# Altium PCB PCB1.PcbDoc
Units mm, origin at the board's own origin, x right, y up, seen from the top; angles counter-clockwise.
Board outline 96.39 x 101.85 mm, 2 copper layers (Top Layer, Bottom Layer); 123 components, 13 nets, 380 pads, 0 vias.
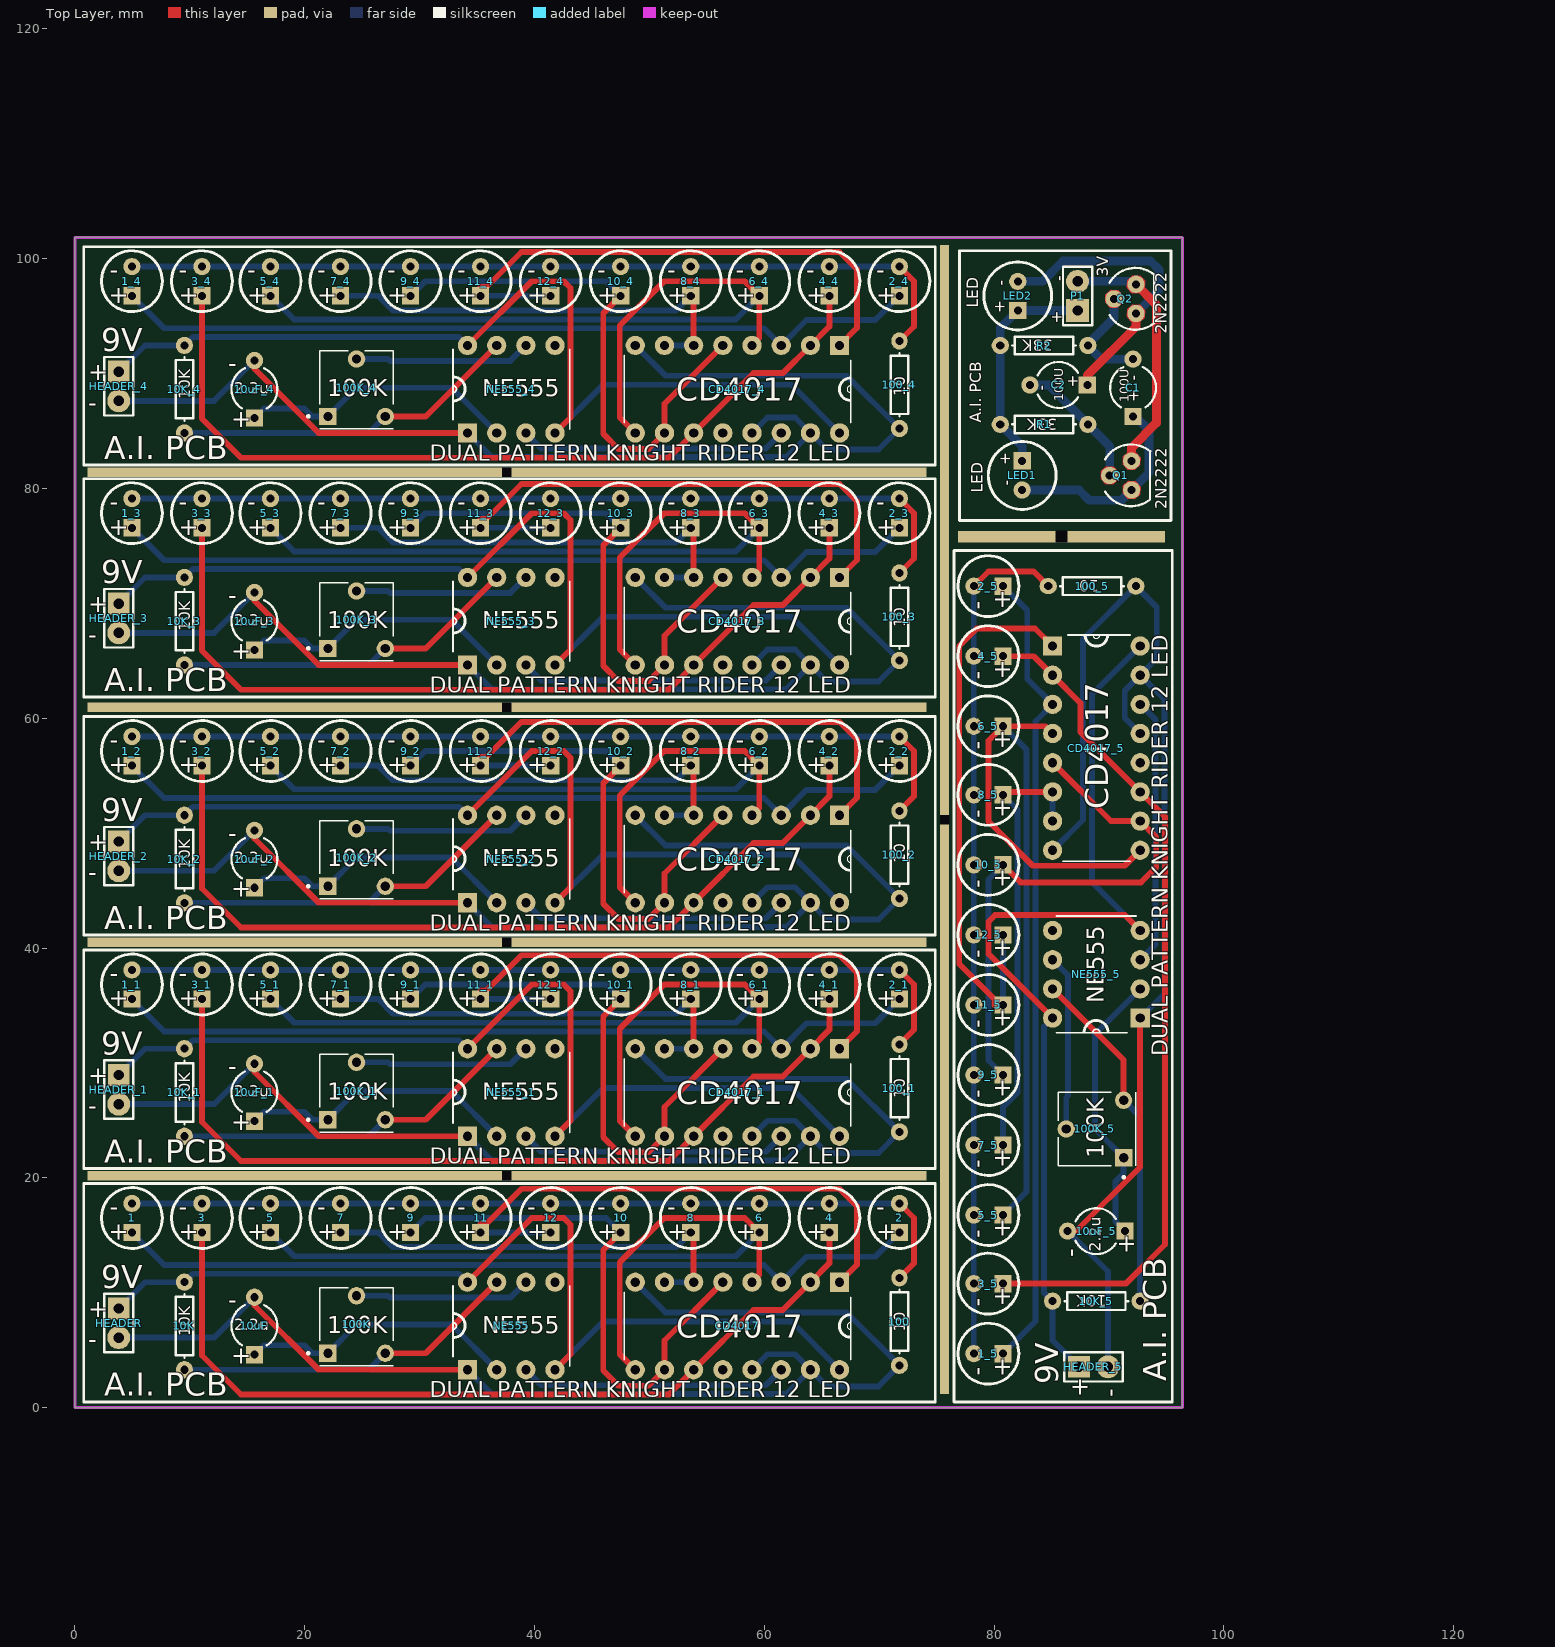
[diagram p0: Top Layer view]
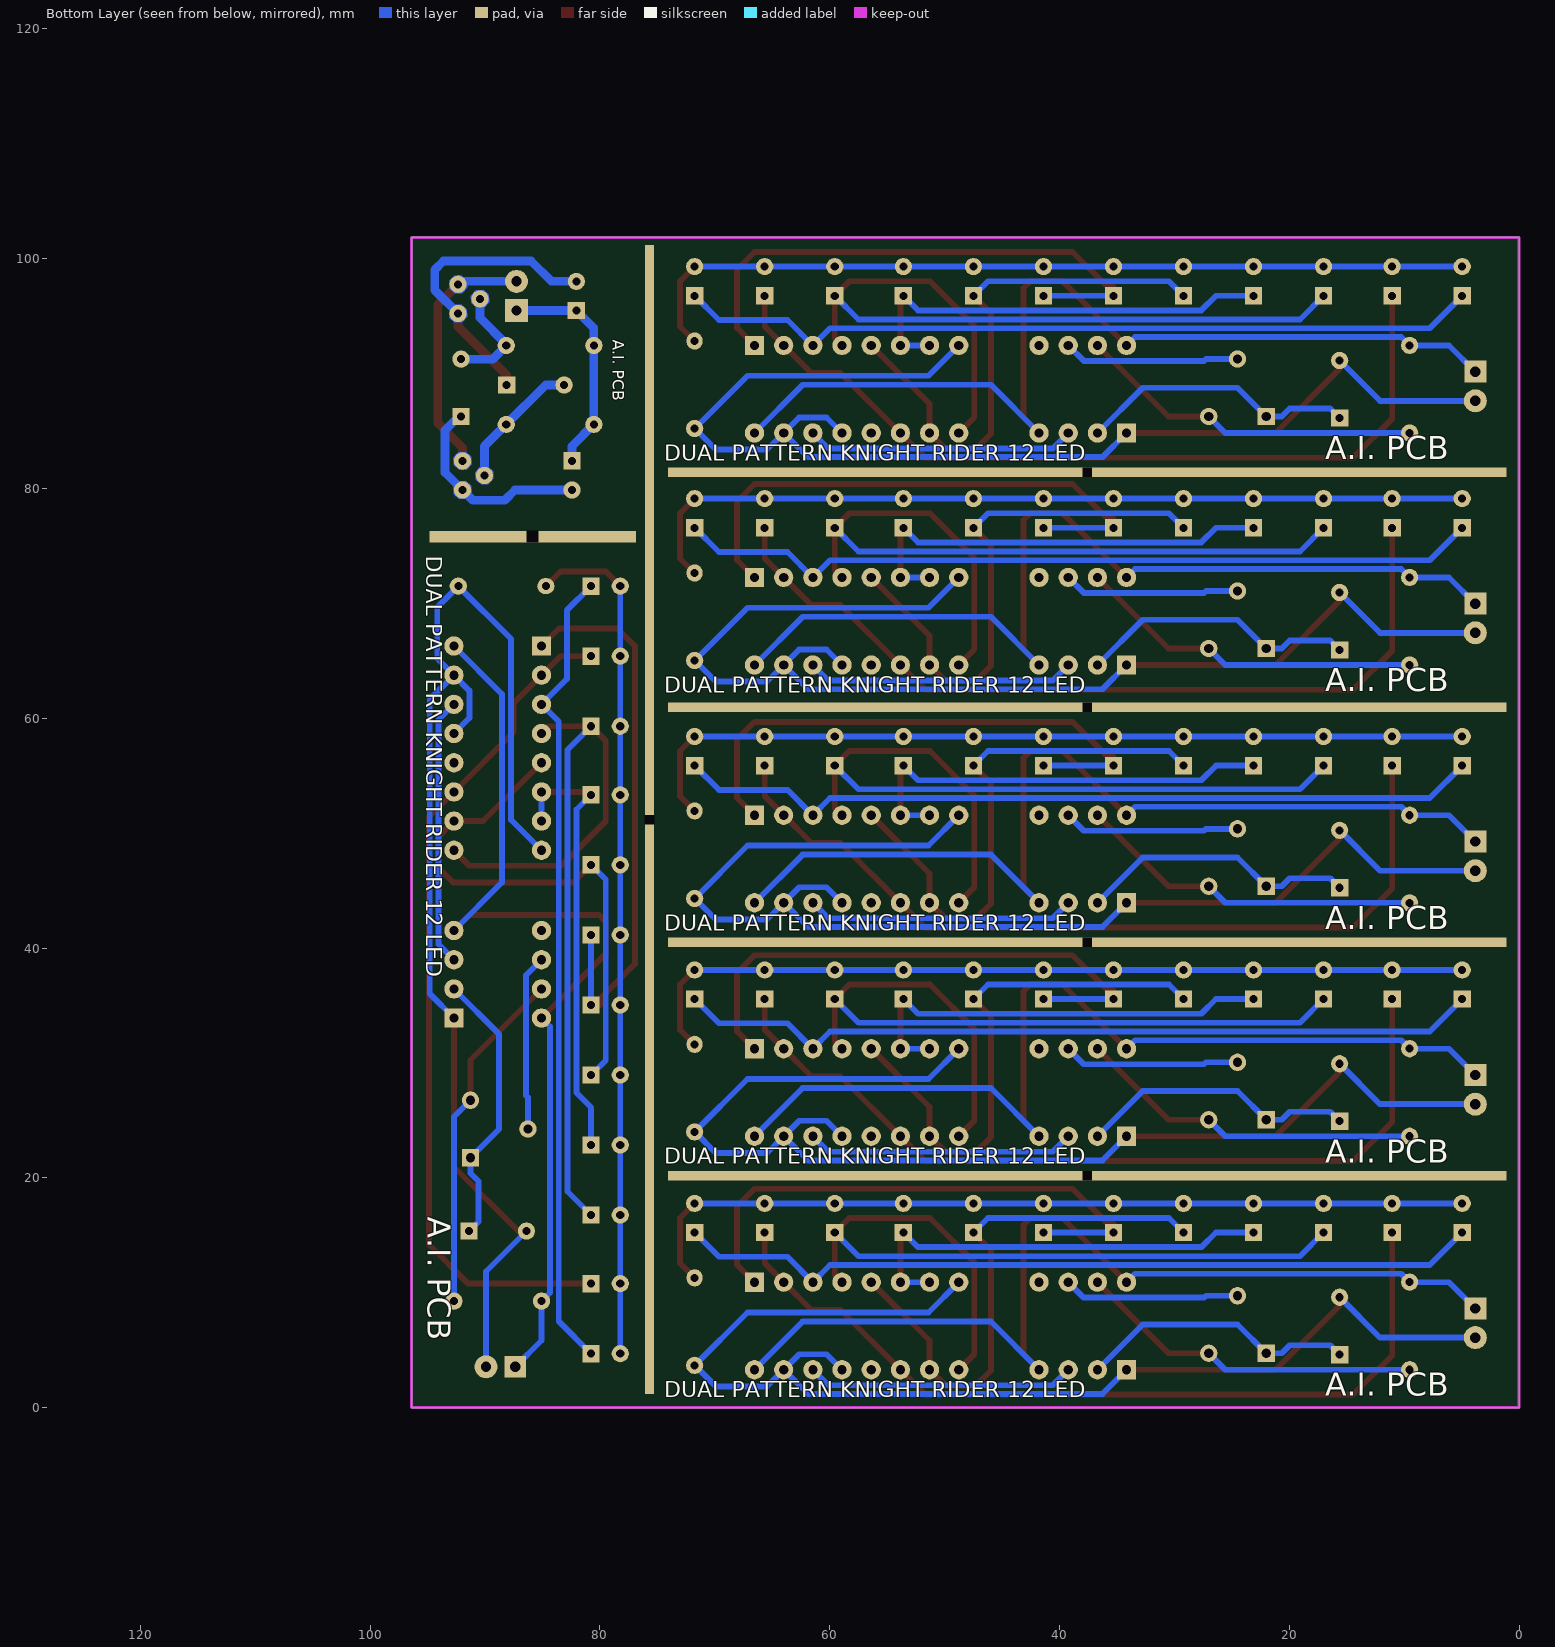
[diagram p1: Bottom Layer view, seen from below]

## Layer stack, top to bottom
Top Solder: solder mask 0.0102, Solder Resist, Dk 3.5
Top Layer: signal copper 0.0356
Dielectric 1: dielectric 0.32, FR-4, Dk 4.8
Bottom Layer: signal copper 0.0356
Bottom Solder: solder mask 0.0102, Solder Resist, Dk 3.5

## Board outline
0,0 0,101.854 96.393,101.854 96.393,0

## Design rules (kind name [scope] priority, off if disabled: settings)
Clearance [All] p1: gap=0.254 ignorepadtopadclearanceinfootprint=FALSE except(0: Arc-Hole Track-Hole SMDPad-Hole THPad-Hole Via-Hole Fill-Hole Poly-Hole Region-Hole Text-Hole)
PolygonConnect [All] p1: connectstyle=Relief reliefconductorwidth=0.254 reliefentries=4 polygonreliefangle="90 Angle" airgapwidth=0.254
RoutingVias [All] p1: holewidth=0.711 width=1.27 viastyle="Through Hole" minholewidth=0.711 minwidth=1.27 maxholewidth=0.711 maxwidth=1.27
SolderMaskExpansion [All] p1: expansion=0.102
Width [All] p1: maxlimit=0.762 minlimit=0.254 preferedwidth=0.508
30 further rules are at their usual default settings.

## Classes and differential pairs
component class Sheet1: 1 2 3 4 5 6 7 8 9 10 10K 10uF 11 12 100 100K CD4017 HEADER NE555

## Components (designator, comment, footprint, x,y, rotation, side; value= is the part's Value field where it differs from the comment)
1 "L-53GD" L-53GD 4.953,16.51 r90 top
1_1 "L-53GD" L-53GD 4.953,36.83 r90 top (schematic designator 1)
1_2 "L-53GD" L-53GD 4.953,57.15 r90 top (schematic designator 1)
1_3 "L-53GD" L-53GD 4.953,77.851 r90 top (schematic designator 1)
1_4 "L-53GD" L-53GD 4.953,98.044 r90 top (schematic designator 1)
1_5 "L-53GD" L-53GD 79.502,4.699 r180 top (schematic designator 1)
2 "L-53GD" L-53GD 71.755,16.51 r90 top
2_1 "L-53GD" L-53GD 71.755,36.83 r90 top (schematic designator 2)
2_2 "L-53GD" L-53GD 71.755,57.15 r90 top (schematic designator 2)
2_3 "L-53GD" L-53GD 71.755,77.851 r90 top (schematic designator 2)
2_4 "L-53GD" L-53GD 71.755,98.044 r90 top (schematic designator 2)
2_5 "L-53GD" L-53GD 79.502,71.501 r180 top (schematic designator 2)
3 "L-53GD" L-53GD 11.049,16.51 r90 top
3_1 "L-53GD" L-53GD 11.049,36.83 r90 top (schematic designator 3)
3_2 "L-53GD" L-53GD 11.049,57.15 r90 top (schematic designator 3)
3_3 "L-53GD" L-53GD 11.049,77.851 r90 top (schematic designator 3)
3_4 "L-53GD" L-53GD 11.049,98.044 r90 top (schematic designator 3)
3_5 "L-53GD" L-53GD 79.502,10.795 r180 top (schematic designator 3)
4 "L-53GD" L-53GD 65.659,16.51 r90 top
4_1 "L-53GD" L-53GD 65.659,36.83 r90 top (schematic designator 4)
4_2 "L-53GD" L-53GD 65.659,57.15 r90 top (schematic designator 4)
4_3 "L-53GD" L-53GD 65.659,77.851 r90 top (schematic designator 4)
4_4 "L-53GD" L-53GD 65.659,98.044 r90 top (schematic designator 4)
4_5 "L-53GD" L-53GD 79.502,65.405 r180 top (schematic designator 4)
5 "L-53GD" L-53GD 17.018,16.51 r90 top
5_1 "L-53GD" L-53GD 17.018,36.83 r90 top (schematic designator 5)
5_2 "L-53GD" L-53GD 17.018,57.15 r90 top (schematic designator 5)
5_3 "L-53GD" L-53GD 17.018,77.851 r90 top (schematic designator 5)
5_4 "L-53GD" L-53GD 17.018,98.044 r90 top (schematic designator 5)
5_5 "L-53GD" L-53GD 79.502,16.764 r180 top (schematic designator 5)
6 "L-53GD" L-53GD 59.563,16.51 r90 top
6_1 "L-53GD" L-53GD 59.563,36.83 r90 top (schematic designator 6)
6_2 "L-53GD" L-53GD 59.563,57.15 r90 top (schematic designator 6)
6_3 "L-53GD" L-53GD 59.563,77.851 r90 top (schematic designator 6)
6_4 "L-53GD" L-53GD 59.563,98.044 r90 top (schematic designator 6)
6_5 "L-53GD" L-53GD 79.502,59.309 r180 top (schematic designator 6)
7 "L-53GD" L-53GD 23.114,16.51 r90 top
7_1 "L-53GD" L-53GD 23.114,36.83 r90 top (schematic designator 7)
7_2 "L-53GD" L-53GD 23.114,57.15 r90 top (schematic designator 7)
7_3 "L-53GD" L-53GD 23.114,77.851 r90 top (schematic designator 7)
7_4 "L-53GD" L-53GD 23.114,98.044 r90 top (schematic designator 7)
7_5 "L-53GD" L-53GD 79.502,22.86 r180 top (schematic designator 7)
8 "L-53GD" L-53GD 53.594,16.51 r90 top
8_1 "L-53GD" L-53GD 53.594,36.83 r90 top (schematic designator 8)
8_2 "L-53GD" L-53GD 53.594,57.15 r90 top (schematic designator 8)
8_3 "L-53GD" L-53GD 53.594,77.851 r90 top (schematic designator 8)
8_4 "L-53GD" L-53GD 53.594,98.044 r90 top (schematic designator 8)
8_5 "L-53GD" L-53GD 79.502,53.34 r180 top (schematic designator 8)
9 "L-53GD" L-53GD 29.21,16.51 r90 top
9_1 "L-53GD" L-53GD 29.21,36.83 r90 top (schematic designator 9)
9_2 "L-53GD" L-53GD 29.21,57.15 r90 top (schematic designator 9)
9_3 "L-53GD" L-53GD 29.21,77.851 r90 top (schematic designator 9)
9_4 "L-53GD" L-53GD 29.21,98.044 r90 top (schematic designator 9)
9_5 "L-53GD" L-53GD 79.502,28.956 r180 top (schematic designator 9)
10 "L-53GD" L-53GD 47.498,16.51 r90 top
10_1 "L-53GD" L-53GD 47.498,36.83 r90 top (schematic designator 10)
10_2 "L-53GD" L-53GD 47.498,57.15 r90 top (schematic designator 10)
10_3 "L-53GD" L-53GD 47.498,77.851 r90 top (schematic designator 10)
10_4 "L-53GD" L-53GD 47.498,98.044 r90 top (schematic designator 10)
10_5 "L-53GD" L-53GD 79.502,47.244 r180 top (schematic designator 10)
10K "Res1" AXIAL-0.3#1 9.525,7.112 r90 top value=1K
10K_1 "Res1" AXIAL-0.3#1 9.525,27.432 r90 top value=1K (schematic designator 10K)
10K_2 "Res1" AXIAL-0.3#1 9.525,47.752 r90 top value=1K (schematic designator 10K)
10K_3 "Res1" AXIAL-0.3#1 9.525,68.453 r90 top value=1K (schematic designator 10K)
10K_4 "Res1" AXIAL-0.3#1 9.525,88.646 r90 top value=1K (schematic designator 10K)
10K_5 "Res1" AXIAL-0.3#1 88.9,9.271 r180 top value=1K (schematic designator 10K)
10uF "Cap2" CAPR5-4X5 15.621,7.112 r90 top value=10uF
10uF_1 "Cap2" CAPR5-4X5 15.621,27.432 r90 top value=10uF (schematic designator 10uF)
10uF_2 "Cap2" CAPR5-4X5 15.621,47.752 r90 top value=10uF (schematic designator 10uF)
10uF_3 "Cap2" CAPR5-4X5 15.621,68.453 r90 top value=10uF (schematic designator 10uF)
10uF_4 "Cap2" CAPR5-4X5 15.621,88.646 r90 top value=10uF (schematic designator 10uF)
10uF_5 "Cap2" CAPR5-4X5 88.9,15.367 r180 top value=10uF (schematic designator 10uF)
11 "L-53GD" L-53GD 35.306,16.51 r90 top
11_1 "L-53GD" L-53GD 35.306,36.83 r90 top (schematic designator 11)
11_2 "L-53GD" L-53GD 35.306,57.15 r90 top (schematic designator 11)
11_3 "L-53GD" L-53GD 35.306,77.851 r90 top (schematic designator 11)
11_4 "L-53GD" L-53GD 35.306,98.044 r90 top (schematic designator 11)
11_5 "L-53GD" L-53GD 79.502,35.052 r180 top (schematic designator 11)
12 "L-53GD" L-53GD 41.402,16.51 r90 top
12_1 "L-53GD" L-53GD 41.402,36.83 r90 top (schematic designator 12)
12_2 "L-53GD" L-53GD 41.402,57.15 r90 top (schematic designator 12)
12_3 "L-53GD" L-53GD 41.402,77.851 r90 top (schematic designator 12)
12_4 "L-53GD" L-53GD 41.402,98.044 r90 top (schematic designator 12)
12_5 "L-53GD" L-53GD 79.502,41.148 r180 top (schematic designator 12)
100 "Res1" AXIAL-0.3#2 71.755,7.493 r90 top value=1K
100_1 "Res1" AXIAL-0.3#2 71.755,27.813 r90 top value=1K (schematic designator 100)
100_2 "Res1" AXIAL-0.3#2 71.755,48.133 r90 top value=1K (schematic designator 100)
100_3 "Res1" AXIAL-0.3#2 71.755,68.834 r90 top value=1K (schematic designator 100)
100_4 "Res1" AXIAL-0.3#2 71.755,89.027 r90 top value=1K (schematic designator 100)
100_5 "Res1" AXIAL-0.3#2 88.519,71.501 r180 top value=1K (schematic designator 100)
100K "EVN-D8AA03B14" *TRIM_EVN-D8AA03B14 24.511,7.239 r0 top
100K_1 "EVN-D8AA03B14" *TRIM_EVN-D8AA03B14 24.511,27.559 r0 top (schematic designator 100K)
100K_2 "EVN-D8AA03B14" *TRIM_EVN-D8AA03B14 24.511,47.879 r0 top (schematic designator 100K)
100K_3 "EVN-D8AA03B14" *TRIM_EVN-D8AA03B14 24.511,68.58 r0 top (schematic designator 100K)
100K_4 "EVN-D8AA03B14" *TRIM_EVN-D8AA03B14 24.511,88.773 r0 top (schematic designator 100K)
100K_5 "EVN-D8AA03B14" *TRIM_EVN-D8AA03B14 88.773,24.257 r90 top (schematic designator 100K)
C1 "Cap1" CAPR5-4X5 92.091,88.757 r90 top value=100uF
C2 "Cap2" CAPR5-4X5 85.614,89.011 r180 top value=100uF
CD4017 "CD4017BE" *DIP254P762X508-16 48.768,3.302 r270 top
CD4017_1 "CD4017BE" *DIP254P762X508-16 48.768,23.622 r270 top (schematic designator CD4017)
CD4017_2 "CD4017BE" *DIP254P762X508-16 48.768,43.942 r270 top (schematic designator CD4017)
CD4017_3 "CD4017BE" *DIP254P762X508-16 48.768,64.643 r270 top (schematic designator CD4017)
CD4017_4 "CD4017BE" *DIP254P762X508-16 48.768,84.836 r270 top (schematic designator CD4017)
CD4017_5 "CD4017BE" *DIP254P762X508-16 92.71,48.514 r0 top (schematic designator CD4017)
HEADER "Header 2" HDR1X2#1 3.81,8.636 r270 top
HEADER_1 "Header 2" HDR1X2#1 3.81,28.956 r270 top (schematic designator HEADER)
HEADER_2 "Header 2" HDR1X2#1 3.81,49.276 r270 top (schematic designator HEADER)
HEADER_3 "Header 2" HDR1X2#1 3.81,69.977 r270 top (schematic designator HEADER)
HEADER_4 "Header 2" HDR1X2#1 3.81,90.17 r270 top (schematic designator HEADER)
HEADER_5 "Header 2" HDR1X2#1 87.376,3.556 r0 top (schematic designator HEADER)
LED1 "L-53GD" L-53GD 82.439,81.137 r270 top
LED2 "L-53GD" L-53GD 82.058,96.758 r90 top
NE555 "NE555N" *DIP254P762X533-8 41.783,10.922 r90 top
NE555_1 "NE555N" *DIP254P762X533-8 41.783,31.242 r90 top (schematic designator NE555)
NE555_2 "NE555N" *DIP254P762X533-8 41.783,51.562 r90 top (schematic designator NE555)
NE555_3 "NE555N" *DIP254P762X533-8 41.783,72.263 r90 top (schematic designator NE555)
NE555_4 "NE555N" *DIP254P762X533-8 41.783,92.456 r90 top (schematic designator NE555)
NE555_5 "NE555N" *DIP254P762X533-8 85.09,41.529 r180 top (schematic designator NE555)
P1 "Header 2" HDR1X2#2 87.265,95.488 r90 top
Q1 "P2N2222A" *TO92 91.964,81.137 r90 top
Q2 "P2N2222A" *TO92 92.345,96.504 r90 top
R1 "Res1" AXIAL-0.3#1 84.344,85.582 r180 top value=33K
R2 "Res1" AXIAL-0.3#1 84.344,92.44 r180 top value=33K

## Footprints (in the part's own frame and the unit in brackets; to place one, negate y for a bottom-side part, rotate by r counter-clockwise, add the part's x,y. Pads: shape width x height; smd on the part's side, far side on the other; paste and mask are expansions set on the pad)
*DIP254P762X508-16 [mil]
  rect 66x66 hole 31.5: 1(-300,700)
  round 66 hole 31.5: 2(-300,600) 3(-300,500) 4(-300,400) 5(-300,300) 6(-300,200) 7(-300,100) 8(-300,0) 9(0,0) 10(0,100) 11(0,200) 12(0,300) 13(0,400) 14(0,500) 15(0,600) 16(0,700)
  silkscreen extent -265,-38 -35,738
*DIP254P762X533-8 [mil]
  rect 66x66 hole 31.5: 1(-300,300)
  round 66 hole 31.5: 2(-300,200) 3(-300,100) 4(-300,0) 5(0,0) 6(0,100) 7(0,200) 8(0,300)
  silkscreen extent -287,-50 -13,350
*TO92 [mm]
  round 1.5 hole 0.7: 1(1.27,0) 2(0,1.905) 3(-1.27,0)
  Top Layer region: 2.058,0.287 1.624,0.76 0.983,0.788 0.51,0.354 0.482,-0.287 0.916,-0.76 1.557,-0.788 2.03,-0.354
  Top Layer region: 0.788,2.192 0.354,2.665 -0.287,2.693 -0.76,2.259 -0.788,1.618 -0.354,1.145 0.287,1.117 0.76,1.551
  Top Layer region: -0.482,0.287 -0.916,0.76 -1.557,0.788 -2.03,0.354 -2.058,-0.287 -1.624,-0.76 -0.983,-0.788 -0.51,-0.354
  Bottom Layer region: 2.058,0.287 1.624,0.76 0.983,0.788 0.51,0.354 0.482,-0.287 0.916,-0.76 1.557,-0.788 2.03,-0.354
  Bottom Layer region: 0.788,2.192 0.354,2.665 -0.287,2.693 -0.76,2.259 -0.788,1.618 -0.354,1.145 0.287,1.117 0.76,1.551
  Bottom Layer region: -0.482,0.287 -0.916,0.76 -1.557,0.788 -2.03,0.354 -2.058,-0.287 -1.624,-0.76 -0.983,-0.788 -0.51,-0.354
  Multi-Layer region: 2.058,0.287 1.624,0.76 0.983,0.788 0.51,0.354 0.482,-0.287 0.916,-0.76 1.557,-0.788 2.03,-0.354
  Multi-Layer region: 0.788,2.192 0.354,2.665 -0.287,2.693 -0.76,2.259 -0.788,1.618 -0.354,1.145 0.287,1.117 0.76,1.551
  Multi-Layer region: -0.482,0.287 -0.916,0.76 -1.557,0.788 -2.03,0.354 -2.058,-0.287 -1.624,-0.76 -0.983,-0.788 -0.51,-0.354
  silkscreen extent -2.68,-1.61 2.7,2.3
*TRIM_EVN-D8AA03B14 [mm]
  rect 1.508x1.508 hole 0.8: 1(-2.5,-2.5)
  round 1.508 hole 0.8: 2(0,2.5) 3(2.5,-2.5)
  silkscreen extent -4.3,-3.57 3.2,3.2
AXIAL-0.3#1 [mm] "Axial Device, Thru-Hole; 2 Leads; 0.3 in Pin Spacing"
  round 1.5 hole 0.7: 1(-3.81,0) 2(3.81,0)
  silkscreen extent -2.77,-0.76 2.77,0.76
AXIAL-0.3#2 [mm] "Axial Device, Thru-Hole; 2 Leads; 0.3 in Pin Spacing"
  round 1.5 hole 0.7: 1(-3.81,0)
  oval 1.5x1.4 hole 0.7: 2(3.81,0)
  silkscreen extent -2.77,-0.76 2.77,0.76
CAPR5-4X5 [mm] "Capacitor; 2 Leads"
  rect 1.5x1.5 hole 0.7: 1(-2.5,0)
  round 1.5 hole 0.7: 2(2.5,0)
  silkscreen extent -1.69,-2 1.82,2
HDR1X2#1 [mm] "Connector; Header; 2 Position"
  rect 1.9x1.9 hole 0.9: 1(0,0)
  round 2 hole 0.9: 2(2.54,0)
  silkscreen extent -1.27,-1.27 3.81,1.27
HDR1X2#2 [mm] "Connector; Header; 2 Position"
  rect 2x2 hole 0.9: 1(0,0)
  round 2 hole 0.9: 2(2.54,0)
  silkscreen extent -1.27,-1.27 3.81,1.27
L-53GD [mm]
  rect 1.5x1.5 hole 0.7: 1(-1.27,0)
  round 1.5 hole 0.7: 2(1.27,0)
  silkscreen extent -2.65,-2.65 2.65,2.65

## Part data
1 1_1 1_2 1_3 1_4 1_5 2 2_1 2_2 2_3 2_4 2_5 3 3_1 3_2 3_3 3_4 3_5 4 4_1 4_2 4_3 4_4 4_5 5 5_1 5_2 5_3 5_4 5_5 6 6_1 6_2 6_3 6_4 6_5 7 7_1 7_2 7_3 7_4 7_5 8 8_1 8_2 8_3 8_4 8_5 9 9_1 9_2 9_3 9_4 9_5 10 10_1 10_2 10_3 10_4 10_5 11 11_1 11_2 11_3 11_4 11_5 12 12_1 12_2 12_3 12_4 12_5 LED1 LED2: "LED", Manufacturer_Name=Kingbright, Mouser Part Number=N/A, RS Part Number=2286004A, Allied_Number=70424261, Allied Price/Stock=http://www.alliedelec.com/kingbright-l-53gd/70424261/, Datasheet Link=http://docs-emea.rs-online.com/webdocs/151e/0900766b8151e408.pdf, Manufacturer_Part_Number=L-53GD, Mouser Price/Stock=https://www.mouser.com/Search/Refine.aspx?Keyword=N%2FA, RS Price/Stock=http://uk.rs-online.com/web/p/products/2286004A
10K 10K_1 10K_2 10K_3 10K_4 10K_5 100 100_1 100_2 100_3 100_4 100_5 R1 R2: "Resistor", LatestRevisionDate=17-Jul-2002, LatestRevisionNote="Re-released for DXP Platform.", PackageDescription="Axial Device, Thru-Hole; 2 Leads; 0.3 in Pin Spacing", PackageReference=AXIAL-0.3, Published=8-Jun-2000, Publisher="Altium Limited"
10uF 10uF_1 10uF_2 10uF_3 10uF_4 10uF_5 C2: "Capacitor", PackageDescription="Capacitor; 2 Leads", PackageReference=CAPR5-4X5, Published=23-Sep-2002, Publisher="Altium Limited"
100K 100K_1 100K_2 100K_3 100K_4 100K_5: "Trimmer; Carbon; Rest 10 Kilohms; PCB; 1 Turn; Pwr-Rtg 0.1 W; Linear; Top Adj; 6 mm SQ", Package="PQFP-44 Panasonic", Availability=Unavailable, MF="Panasonic Electronic", MP=EVN-D8AA03B14, Price=None, SnapEDA_Link=https://www.snapeda.com/parts/EVN-D8AA03B14/Panasonic%20Electronic%20Components/view-part/?ref=snap
C1: library part Cap2, "Capacitor", PackageDescription="Capacitor; 2 Leads", PackageReference=CAPR5-4X5, Published=23-Sep-2002, Publisher="Altium Limited"
CD4017 CD4017_1 CD4017_2 CD4017_3 CD4017_4 CD4017_5: "IC Mos 4017/CD4017BE HARRIS", Package="DIP-16 Intersil", Availability=Unavailable, MF=Texas, MP=CD4017BE, Price=None, SnapEDA_Link=https://www.snapeda.com/parts/CD4017BE/Texas%20Instruments/view-part/?ref=snap
HEADER HEADER_1 HEADER_2 HEADER_3 HEADER_4 HEADER_5 P1: "Header, 2-Pin", LatestRevisionDate=17-Jul-2002, LatestRevisionNote="Re-released for DXP Platform.", Publisher="Altium Limited"
NE555 NE555_1 NE555_2 NE555_3 NE555_4 NE555_5: Package="DIP-8 Texas Instruments", Availability=Unavailable, MF="ON Semiconductor", MP=NE555N, Price=None, SnapEDA_Link=https://www.snapeda.com/parts/NE555N/ON%20Semiconductor/view-part/?ref=snap
Q1 Q2: Package="TO-92 NXP Semiconductors", Availability=Unavailable, MF="ON Semiconductor", MP=P2N2222A, Price=None, SnapEDA_Link=https://www.snapeda.com/parts/P2N2222A/ON%20Semiconductor/view-part/?ref=snap

## Free pads (board coordinates)
  rect 73x0.8 hole 0.8 square: 2(37.592,20.193) 2(37.592,40.513) 2(37.592,60.96) 2(37.592,81.407)
  rect 0.8x100 hole 0.8 square: 2(75.692,51.181)
  rect 18x1 hole 1 square: 3(85.852,75.819)

## Nets (pads, with @x,y where several pads share a name; then routed paths per layer and width w, separated by ;. In a path a pad name is that pad's centre, name@x,y a point inside that pad or via, vN(x,y) a via of type N, cw(c..) or ccw(c..) an arc to the next point about the centre after c; other vN are vias at no path point)
Net1_1: 1.1 2.1 CD4017.3 | length 70.4
  Bottom Layer w0.508: 1.1 7.772,12.421 59.969,12.421 CD4017.3 63.678,13.132 69.647,13.132 2.1
Net1_2: 1.2 2.2 3.2 4.2 5.2 6.2 7.2 8.2 9.2 10.2 11.2 12.2 100.2 | length 74.3
  Top Layer w0.508: 100.2 73.025,12.573 73.025,16.51 2.2
  Bottom Layer w0.508: 1.2 3.2 5.2 7.2 9.2 11.2 12.2 10.2 8.2 6.2 4.2 2.2
Net3_1: 3.1 4.1 CD4017.2 CD4017.11 | length 74.1
  Top Layer w0.508: 3.1 11.049,4.547 14.453,1.143 51.689,1.143 CD4017.11 59.055,8.509 61.595,8.509 CD4017.2 65.659,12.573 4.1
Net5_1: 5.1 6.1 CD4017.4 CD4017.9 | length 73
  Top Layer w0.508: CD4017.9 47.422,4.648 47.422,12.649 51.283,16.51 58.293,16.51 6.1 59.563,11.557 CD4017.4
  Bottom Layer w0.508: 5.1 19.075,13.183 57.506,13.183 6.1
Net7_1: 7.1 8.1 CD4017.6 CD4017.7 | length 38.5
  Top Layer w0.508: 8.1 53.848,14.986 CD4017.6
  Bottom Layer w0.508: 7.1 26.391,15.24 27.661,13.97 52.324,13.97 8.1 ; CD4017.7 CD4017.6
Net9_1: 9.1 10.1 CD4017.5 CD4017.10 | length 48.2
  Top Layer w0.508: 10.1 45.974,13.716 45.974,3.226 47.295,1.905 49.911,1.905 CD4017.10 51.308,5.842 CD4017.5
  Bottom Layer w0.508: 9.1 30.48,16.51 46.228,16.51 10.1
Net10K_1: 10K.1 100K.3 NE555.7 | length 30.3
  Top Layer w0.508: 100K.3 30.52,4.739 NE555.7
  Bottom Layer w0.508: 10K.1 25.574,3.302 100K.3
Net10K_2: 10K.2 CD4017.16 HEADER.1 NE555.4 NE555.8 | length 84.9
  Top Layer w0.508: NE555.8 39.751,16.51 42.545,16.51 43.129,15.926 43.129,4.648 NE555.4
  Bottom Layer w0.508: HEADER.1 6.096,10.922 10K.2 10.262,11.659 33.426,11.659 NE555.8 ; NE555.4 45.974,7.493 62.357,7.493 CD4017.16
Net10uF_1: 10uF.1 100K.1 NE555.2 | length 24.4
  Bottom Layer w0.508: 10uF.1 16.447,5.437 19.96,5.437 20.658,4.739 100K.1 24.511,7.239 32.766,7.239 NE555.2
Net10uF_2: 10uF.2 100.1 CD4017.8 CD4017.13 CD4017.15 HEADER.2 NE555.1 | length 107.7
  Top Layer w0.508: 10uF.2 15.621,8.89 21.209,3.302 NE555.1
  Bottom Layer w0.508: HEADER.2 12.105,6.096 10uF.2 ; NE555.1 36.271,1.194 61.9,1.194 CD4017.15 ; CD4017.8 51.41,8.28 67.158,8.28 100.1 69.926,1.854 65.456,1.854 CD4017.15 ; CD4017.13 60.274,4.648 62.662,4.648 CD4017.15
Net11_1: 11.1 12.1 CD4017.1 | length 48.8
  Top Layer w0.508: 11.1 35.306,16.002 35.814,16.002 38.862,19.05 66.548,19.05 68.072,17.526 68.072,12.446 CD4017.1
  Bottom Layer w0.508: 11.1 12.1
Net100K_2: 100K.2 NE555.6 | length 15.4
  Bottom Layer w0.508: 100K.2 27.254,9.739 27.417,9.576 37.897,9.576 NE555.6
NetCD4017_14: CD4017.14 NE555.3 | length 23.3
  Bottom Layer w0.508: NE555.3 40.589,1.956 60.122,1.956 CD4017.14
pads on no net: 1_1.1 1_1.2 1_2.1 1_2.2 1_3.1 1_3.2 1_4.1 1_4.2 1_5.1 1_5.2 2_1.1 2_1.2 2_2.1 2_2.2 2_3.1 2_3.2 2_4.1 2_4.2 2_5.1 2_5.2 3_1.1 3_1.2 3_2.1 3_2.2 3_3.1 3_3.2 3_4.1 3_4.2 3_5.1 3_5.2 4_1.1 4_1.2 4_2.1 4_2.2 4_3.1 4_3.2 4_4.1 4_4.2 4_5.1 4_5.2 5_1.1 5_1.2 5_2.1 5_2.2 5_3.1 5_3.2 5_4.1 5_4.2 5_5.1 5_5.2 6_1.1 6_1.2 6_2.1 6_2.2 6_3.1 6_3.2 6_4.1 6_4.2 6_5.1 6_5.2 7_1.1 7_1.2 7_2.1 7_2.2 7_3.1 7_3.2 7_4.1 7_4.2 7_5.1 7_5.2 8_1.1 8_1.2 8_2.1 8_2.2 8_3.1 8_3.2 8_4.1 8_4.2 8_5.1 8_5.2 9_1.1 9_1.2 9_2.1 9_2.2 9_3.1 9_3.2 9_4.1 9_4.2 9_5.1 9_5.2 10_1.1 10_1.2 10_2.1 10_2.2 10_3.1 10_3.2 10_4.1 10_4.2 10_5.1 10_5.2 10K_1.1 10K_1.2 10K_2.1 10K_2.2 10K_3.1 10K_3.2 10K_4.1 10K_4.2 10K_5.1 10K_5.2 10uF_1.1 10uF_1.2 10uF_2.1 10uF_2.2 10uF_3.1 10uF_3.2 10uF_4.1 10uF_4.2 10uF_5.1 10uF_5.2 11_1.1 11_1.2 11_2.1 11_2.2 11_3.1 11_3.2 11_4.1 11_4.2 11_5.1 11_5.2 12_1.1 12_1.2 12_2.1 12_2.2 12_3.1 12_3.2 12_4.1 12_4.2 12_5.1 12_5.2 100_1.1 100_1.2 100_2.1 100_2.2 100_3.1 100_3.2 100_4.1 100_4.2 100_5.1 100_5.2 100K_1.1 100K_1.2 100K_1.3 100K_2.1 100K_2.2 100K_2.3 100K_3.1 100K_3.2 100K_3.3 100K_4.1 100K_4.2 100K_4.3 100K_5.1 100K_5.2 100K_5.3 C1.1 C1.2 C2.1 C2.2 CD4017.12 CD4017_1.1 CD4017_1.2 CD4017_1.3 CD4017_1.4 CD4017_1.5 CD4017_1.6 CD4017_1.7 CD4017_1.8 CD4017_1.9 CD4017_1.10 CD4017_1.11 CD4017_1.12 CD4017_1.13 CD4017_1.14 CD4017_1.15 CD4017_1.16 CD4017_2.1 CD4017_2.2 CD4017_2.3 CD4017_2.4 CD4017_2.5 CD4017_2.6 CD4017_2.7 CD4017_2.8 CD4017_2.9 CD4017_2.10 CD4017_2.11 CD4017_2.12 CD4017_2.13 CD4017_2.14 CD4017_2.15 CD4017_2.16 CD4017_3.1 CD4017_3.2 CD4017_3.3 CD4017_3.4 CD4017_3.5 CD4017_3.6 CD4017_3.7 CD4017_3.8 CD4017_3.9 CD4017_3.10 CD4017_3.11 CD4017_3.12 CD4017_3.13 CD4017_3.14 CD4017_3.15 CD4017_3.16 CD4017_4.1 CD4017_4.2 CD4017_4.3 CD4017_4.4 CD4017_4.5 CD4017_4.6 CD4017_4.7 CD4017_4.8 CD4017_4.9 CD4017_4.10 CD4017_4.11 CD4017_4.12 CD4017_4.13 CD4017_4.14 CD4017_4.15 CD4017_4.16 CD4017_5.1 CD4017_5.2 CD4017_5.3 CD4017_5.4 CD4017_5.5 CD4017_5.6 CD4017_5.7 CD4017_5.8 CD4017_5.9 CD4017_5.10 CD4017_5.11 CD4017_5.12 CD4017_5.13 CD4017_5.14 CD4017_5.15 CD4017_5.16 HEADER_1.1 HEADER_1.2 HEADER_2.1 HEADER_2.2 HEADER_3.1 HEADER_3.2 HEADER_4.1 HEADER_4.2 HEADER_5.1 HEADER_5.2 LED1.1 LED1.2 LED2.1 LED2.2 NE555.5 NE555_1.1 NE555_1.2 NE555_1.3 NE555_1.4 NE555_1.5 NE555_1.6 NE555_1.7 NE555_1.8 NE555_2.1 NE555_2.2 NE555_2.3 NE555_2.4 NE555_2.5 NE555_2.6 NE555_2.7 NE555_2.8 NE555_3.1 NE555_3.2 NE555_3.3 NE555_3.4 NE555_3.5 NE555_3.6 NE555_3.7 NE555_3.8 NE555_4.1 NE555_4.2 NE555_4.3 NE555_4.4 NE555_4.5 NE555_4.6 NE555_4.7 NE555_4.8 NE555_5.1 NE555_5.2 NE555_5.3 NE555_5.4 NE555_5.5 NE555_5.6 NE555_5.7 NE555_5.8 P1.1 P1.2 Q1.1 Q1.2 Q1.3 Q2.1 Q2.2 Q2.3 R1.1 R1.2 R2.1 R2.2
copper on no net: | length 3673.2
  Top Layer w0.508: 11.049,35.56 11.049,24.867 14.453,21.463 51.689,21.463 53.848,23.622 59.055,28.829 61.595,28.829 64.008,31.242 65.659,32.893 65.659,35.56 ; 11.049,55.88 11.049,45.187 14.453,41.783 51.689,41.783 53.848,43.942 59.055,49.149 61.595,49.149 64.008,51.562 65.659,53.213 65.659,55.88 ; 11.049,76.581 11.049,65.888 14.453,62.484 51.689,62.484 53.848,64.643 59.055,69.85 61.595,69.85 64.008,72.263 65.659,73.914 65.659,76.581 ; 11.049,96.774 11.049,86.081 14.453,82.677 51.689,82.677 53.848,84.836 59.055,90.043 61.595,90.043 64.008,92.456 65.659,94.107 65.659,96.774 ; 15.621,29.932 15.621,29.21 21.209,23.622 34.163,23.622 ; 15.621,50.252 15.621,49.53 21.209,43.942 34.163,43.942 ; 15.621,70.953 15.621,70.231 21.209,64.643 34.163,64.643 ; 15.621,91.146 15.621,90.424 21.209,84.836 34.163,84.836 ; 27.011,25.059 30.52,25.059 36.703,31.242 ; 27.011,45.379 30.52,45.379 36.703,51.562 ; 27.011,66.08 30.52,66.08 36.703,72.263 ; 27.011,86.273 30.52,86.273 36.703,92.456 ; 34.163,31.242 39.751,36.83 42.545,36.83 43.129,36.246 43.129,24.968 41.783,23.622 ; 34.163,51.562 39.751,57.15 42.545,57.15 43.129,56.566 43.129,45.288 41.783,43.942 ; 34.163,72.263 39.751,77.851 42.545,77.851 43.129,77.267 43.129,65.989 41.783,64.643 ; 34.163,92.456 39.751,98.044 42.545,98.044 43.129,97.46 43.129,86.182 41.783,84.836 ; 35.306,35.56 35.306,36.322 35.814,36.322 38.862,39.37 66.548,39.37 68.072,37.846 68.072,32.766 66.548,31.242 ; 35.306,55.88 35.306,56.642 35.814,56.642 38.862,59.69 66.548,59.69 68.072,58.166 68.072,53.086 66.548,51.562 ; 35.306,76.581 35.306,77.343 35.814,77.343 38.862,80.391 66.548,80.391 68.072,78.867 68.072,73.787 66.548,72.263 ; 35.306,96.774 35.306,97.536 35.814,97.536 38.862,100.584 66.548,100.584 68.072,99.06 68.072,93.98 66.548,92.456 ; 47.498,35.56 45.974,34.036 45.974,23.546 47.295,22.225 49.911,22.225 51.308,23.622 51.308,26.162 56.388,31.242 ; 47.498,55.88 45.974,54.356 45.974,43.866 47.295,42.545 49.911,42.545 51.308,43.942 51.308,46.482 56.388,51.562 ; 47.498,76.581 45.974,75.057 45.974,64.567 47.295,63.246 49.911,63.246 51.308,64.643 51.308,67.183 56.388,72.263 ; 47.498,96.774 45.974,95.25 45.974,84.76 47.295,83.439 49.911,83.439 51.308,84.836 51.308,87.376 56.388,92.456 ; 48.768,23.622 47.422,24.968 47.422,32.969 51.283,36.83 58.293,36.83 59.563,35.56 59.563,31.877 58.928,31.242 ; 48.768,43.942 47.422,45.288 47.422,53.289 51.283,57.15 58.293,57.15 59.563,55.88 59.563,52.197 58.928,51.562 ; 48.768,64.643 47.422,65.989 47.422,73.99 51.283,77.851 58.293,77.851 59.563,76.581 59.563,72.898 58.928,72.263 ; 48.768,84.836 47.422,86.182 47.422,94.183 51.283,98.044 58.293,98.044 59.563,96.774 59.563,93.091 58.928,92.456 ; 53.594,35.56 53.848,35.306 53.848,31.242 ; 53.594,55.88 53.848,55.626 53.848,51.562 ; 53.594,76.581 53.848,76.327 53.848,72.263 ; 53.594,96.774 53.848,96.52 53.848,92.456 ; 71.755,31.623 73.025,32.893 73.025,36.83 71.755,38.1 ; 71.755,51.943 73.025,53.213 73.025,57.15 71.755,58.42 ; 71.755,72.644 73.025,73.914 73.025,77.851 71.755,79.121 ; 71.755,92.837 73.025,94.107 73.025,98.044 71.755,99.314 ; 78.232,71.501 79.502,72.771 83.439,72.771 84.709,71.501 ; 80.772,10.795 91.465,10.795 94.869,14.199 94.869,51.435 92.71,53.594 87.503,58.801 87.503,61.341 85.09,63.754 83.439,65.405 80.772,65.405 ; 80.772,35.052 80.01,35.052 80.01,35.56 76.962,38.608 76.962,66.294 78.486,67.818 83.566,67.818 85.09,66.294 ; 80.772,47.244 82.296,45.72 92.786,45.72 94.107,47.041 94.107,49.657 92.71,51.054 90.17,51.054 85.09,56.134 ; 80.772,53.34 81.026,53.594 85.09,53.594 ; 85.09,33.909 79.502,39.497 79.502,42.291 80.086,42.875 91.364,42.875 92.71,41.529 ; 85.09,36.449 91.273,30.266 91.273,26.757 ; 85.09,58.674 84.455,59.309 80.772,59.309 79.502,58.039 79.502,51.029 83.363,47.168 91.364,47.168 92.71,48.514 ; 86.4,15.367 87.122,15.367 92.71,20.955 92.71,33.909
  Top Layer w0.762: 88.114,89.011 88.114,89.86 92.345,94.091 92.345,95.234 ; 91.964,82.407 91.964,83.55 94.123,85.709 94.123,95.996 92.345,97.774
  Bottom Layer w0.508: 3.81,26.416 12.105,26.416 15.621,29.932 ; 3.81,28.956 6.096,31.242 9.525,31.242 10.262,31.979 33.426,31.979 34.163,31.242 ; 3.81,46.736 12.105,46.736 15.621,50.252 ; 3.81,49.276 6.096,51.562 9.525,51.562 10.262,52.299 33.426,52.299 34.163,51.562 ; 3.81,67.437 12.105,67.437 15.621,70.953 ; 3.81,69.977 6.096,72.263 9.525,72.263 10.262,73 33.426,73 34.163,72.263 ; 3.81,87.63 12.105,87.63 15.621,91.146 ; 3.81,90.17 6.096,92.456 9.525,92.456 10.262,93.193 33.426,93.193 34.163,92.456 ; 4.953,35.56 7.772,32.741 59.969,32.741 61.468,31.242 63.678,33.452 69.647,33.452 71.755,35.56 ; 4.953,38.1 11.049,38.1 17.018,38.1 23.114,38.1 29.21,38.1 35.306,38.1 41.402,38.1 47.498,38.1 53.594,38.1 59.563,38.1 65.659,38.1 71.755,38.1 ; 4.953,55.88 7.772,53.061 59.969,53.061 61.468,51.562 63.678,53.772 69.647,53.772 71.755,55.88 ; 4.953,58.42 11.049,58.42 17.018,58.42 23.114,58.42 29.21,58.42 35.306,58.42 41.402,58.42 47.498,58.42 53.594,58.42 59.563,58.42 65.659,58.42 71.755,58.42 ; 4.953,76.581 7.772,73.762 59.969,73.762 61.468,72.263 63.678,74.473 69.647,74.473 71.755,76.581 ; 4.953,79.121 11.049,79.121 17.018,79.121 23.114,79.121 29.21,79.121 35.306,79.121 41.402,79.121 47.498,79.121 53.594,79.121 59.563,79.121 65.659,79.121 71.755,79.121 ; 4.953,96.774 7.772,93.955 59.969,93.955 61.468,92.456 63.678,94.666 69.647,94.666 71.755,96.774 ; 4.953,99.314 11.049,99.314 17.018,99.314 23.114,99.314 29.21,99.314 35.306,99.314 41.402,99.314 47.498,99.314 53.594,99.314 59.563,99.314 65.659,99.314 71.755,99.314 ; 9.525,23.622 25.574,23.622 27.011,25.059 ; 9.525,43.942 25.574,43.942 27.011,45.379 ; 9.525,64.643 25.574,64.643 27.011,66.08 ; 9.525,84.836 25.574,84.836 27.011,86.273 ; 15.621,24.932 16.447,25.757 19.96,25.757 20.658,25.059 22.011,25.059 24.511,27.559 32.766,27.559 36.703,23.622 ; 15.621,45.252 16.447,46.077 19.96,46.077 20.658,45.379 22.011,45.379 24.511,47.879 32.766,47.879 36.703,43.942 ; 15.621,65.953 16.447,66.778 19.96,66.778 20.658,66.08 22.011,66.08 24.511,68.58 32.766,68.58 36.703,64.643 ; 15.621,86.146 16.447,86.971 19.96,86.971 20.658,86.273 22.011,86.273 24.511,88.773 32.766,88.773 36.703,84.836 ; 17.018,35.56 19.075,33.503 57.506,33.503 59.563,35.56 ; 17.018,55.88 19.075,53.823 57.506,53.823 59.563,55.88 ; 17.018,76.581 19.075,74.524 57.506,74.524 59.563,76.581 ; 17.018,96.774 19.075,94.717 57.506,94.717 59.563,96.774 ; 23.114,35.56 26.391,35.56 27.661,34.29 52.324,34.29 53.594,35.56 ; 23.114,55.88 26.391,55.88 27.661,54.61 52.324,54.61 53.594,55.88 ; 23.114,76.581 26.391,76.581 27.661,75.311 52.324,75.311 53.594,76.581 ; 23.114,96.774 26.391,96.774 27.661,95.504 52.324,95.504 53.594,96.774 ; 24.511,30.059 27.254,30.059 27.417,29.896 37.897,29.896 39.243,31.242 ; 24.511,50.379 27.254,50.379 27.417,50.216 37.897,50.216 39.243,51.562 ; 24.511,71.08 27.254,71.08 27.417,70.917 37.897,70.917 39.243,72.263 ; 24.511,91.273 27.254,91.273 27.417,91.11 37.897,91.11 39.243,92.456 ; 29.21,35.56 30.48,36.83 46.228,36.83 47.498,35.56 ; 29.21,55.88 30.48,57.15 46.228,57.15 47.498,55.88 ; 29.21,76.581 30.48,77.851 46.228,77.851 47.498,76.581 ; 29.21,96.774 30.48,98.044 46.228,98.044 47.498,96.774 ; 34.163,23.622 36.271,21.514 61.9,21.514 64.008,23.622 ; 34.163,43.942 36.271,41.834 61.9,41.834 64.008,43.942 ; 34.163,64.643 36.271,62.535 61.9,62.535 64.008,64.643 ; 34.163,84.836 36.271,82.728 61.9,82.728 64.008,84.836 ; 35.306,35.56 41.402,35.56 ; 35.306,55.88 41.402,55.88 ; 35.306,76.581 41.402,76.581 ; 35.306,96.774 41.402,96.774 ; 39.243,23.622 40.589,22.276 60.122,22.276 61.468,23.622 ; 39.243,43.942 40.589,42.596 60.122,42.596 61.468,43.942 ; 39.243,64.643 40.589,63.297 60.122,63.297 61.468,64.643 ; 39.243,84.836 40.589,83.49 60.122,83.49 61.468,84.836 ; 41.783,23.622 45.974,27.813 62.357,27.813 66.548,23.622 ; 41.783,43.942 45.974,48.133 62.357,48.133 66.548,43.942 ; 41.783,64.643 45.974,68.834 62.357,68.834 66.548,64.643 ; 41.783,84.836 45.974,89.027 62.357,89.027 66.548,84.836 ; 48.768,31.242 51.41,28.6 67.158,28.6 71.755,24.003 69.926,22.174 65.456,22.174 64.008,23.622 ; 48.768,51.562 51.41,48.92 67.158,48.92 71.755,44.323 69.926,42.494 65.456,42.494 64.008,43.942 ; 48.768,72.263 51.41,69.621 67.158,69.621 71.755,65.024 69.926,63.195 65.456,63.195 64.008,64.643 ; 48.768,92.456 51.41,89.814 67.158,89.814 71.755,85.217 69.926,83.388 65.456,83.388 64.008,84.836 ; 51.308,31.242 53.848,31.242 ; 51.308,51.562 53.848,51.562 ; 51.308,72.263 53.848,72.263 ; 51.308,92.456 53.848,92.456 ; 58.928,23.622 60.274,24.968 62.662,24.968 64.008,23.622 ; 58.928,43.942 60.274,45.288 62.662,45.288 64.008,43.942 ; 58.928,64.643 60.274,65.989 62.662,65.989 64.008,64.643 ; 58.928,84.836 60.274,86.182 62.662,86.182 64.008,84.836 ; 78.232,4.699 78.232,10.795 78.232,16.764 78.232,22.86 78.232,28.956 78.232,35.052 78.232,41.148 78.232,47.244 78.232,53.34 78.232,59.309 78.232,65.405 78.232,71.501 ; 80.772,4.699 83.591,7.518 83.591,59.715 85.09,61.214 82.88,63.424 82.88,69.393 80.772,71.501 ; 80.772,16.764 82.829,18.821 82.829,57.252 80.772,59.309 ; 80.772,22.86 80.772,26.137 82.042,27.407 82.042,52.07 80.772,53.34 ; 80.772,28.956 79.502,30.226 79.502,45.974 80.772,47.244 ; 80.772,35.052 80.772,41.148 ; 85.09,33.909 84.353,33.172 84.353,10.008 85.09,9.271 85.09,5.842 87.376,3.556 ; 85.09,38.989 86.436,37.643 86.436,27.163 86.273,27 86.273,24.257 ; 85.09,48.514 87.732,51.156 87.732,66.904 92.329,71.501 94.158,69.672 94.158,65.202 92.71,63.754 ; 85.09,51.054 85.09,53.594 ; 86.4,15.367 89.916,11.851 89.916,3.556 ; 91.273,26.757 92.71,25.32 92.71,9.271 ; 91.4,15.367 90.575,16.192 90.575,19.706 91.273,20.404 91.273,21.757 88.773,24.257 88.773,32.512 92.71,36.449 ; 92.71,33.909 94.818,36.017 94.818,61.646 92.71,63.754 ; 92.71,38.989 94.056,40.335 94.056,59.868 92.71,61.214 ; 92.71,41.529 88.519,45.72 88.519,62.103 92.71,66.294 ; 92.71,58.674 91.364,60.02 91.364,62.408 92.71,63.754
  Bottom Layer w0.762: 82.058,98.028 84.217,98.028 85.995,99.806 93.615,99.806 94.377,99.044 94.377,97.266 92.345,95.234 ; 82.439,79.867 87.392,79.867 88.281,78.978 91.075,78.978 91.964,79.867 93.488,81.391 93.488,85.074 92.305,86.257 92.091,86.257 ; 82.439,82.407 82.439,83.677 80.534,85.582 80.534,92.44 80.534,93.964 82.058,95.488 87.265,95.488 ; 83.114,89.011 84.725,89.011 88.154,85.582 90.059,83.677 90.059,81.137 ; 87.265,98.028 92.091,98.028 92.345,97.774 ; 90.44,96.504 90.44,94.853 88.154,92.567 88.154,92.44 89.337,91.257 92.091,91.257

## Keep-outs
Keep-Out Layer:
  the board outline again, w0.254

## Silkscreen, mask and mechanical layers (free items; w line width, h text height)
Top Overlay:
  lines w0.254: 33.009,8.179 cw(c32.904,7.137) 33.02,6.096 ; 33.009,28.499 cw(c32.904,27.457) 33.02,26.416 ; 33.009,48.819 cw(c32.904,47.777) 33.02,46.736 ; 33.009,69.52 cw(c32.904,68.478) 33.02,67.437 ; 33.009,89.713 cw(c32.904,88.671) 33.02,87.63 ; 67.429,8.089 ccw(c67.513,7.112) 67.44,6.135 ; 67.429,28.409 ccw(c67.513,27.432) 67.44,26.455 ; 67.429,48.729 ccw(c67.513,47.752) 67.44,46.775 ; 67.429,69.43 ccw(c67.513,68.453) 67.44,67.476 ; 67.429,89.623 ccw(c67.513,88.646) 67.44,87.669 ; 87.833,32.755 cw(c88.875,32.65) 89.916,32.766 ; 87.923,67.175 ccw(c88.9,67.259) 89.877,67.186 ; 0.762,0.508 74.873,0.508 74.873,19.508 0.762,19.508 0.762,0.508 ; 0.762,20.828 0.762,39.828 74.873,39.828 74.873,20.828 0.762,20.828 ; 0.762,41.148 0.762,60.148 74.873,60.148 74.873,41.148 0.762,41.148 ; 0.762,61.849 0.762,80.849 74.873,80.849 74.873,61.849 0.762,61.849 ; 0.762,82.042 0.762,101.042 74.873,101.042 74.873,82.042 0.762,82.042 ; 76.504,0.508 95.504,0.508 95.504,74.619 76.504,74.619 76.504,0.508 ; 76.978,77.2 95.393,77.2 95.393,100.695 76.978,100.695 76.978,77.2
  text "3V" at 89.932,98.409 h1 r90
  text "-" at 3.048,98.298 h1.52
  text "-" at 9.017,98.298 h1.52
  text "-" at 14.986,98.298 h1.52
  text "-" at 21.082,98.298 h1.52
  text "-" at 27.178,98.298 h1.52
  text "-" at 33.274,98.298 h1.52
  text "-" at 39.37,98.298 h1.52
  text "-" at 45.466,98.298 h1.52
  text "-" at 51.562,98.298 h1.52
  text "-" at 57.531,98.298 h1.52
  text "-" at 63.627,98.298 h1.52
  text "-" at 69.723,98.298 h1.52
  text "-" at 86.122,98.028 h1 r90
  text "-" at 81.042,97.647 h1 r90
  text "+" at 2.921,96.139 h1.52
  text "+" at 9.017,96.139 h1.52
  text "+" at 14.986,96.139 h1.52
  text "+" at 21.082,96.139 h1.52
  text "+" at 27.178,96.139 h1.52
  text "+" at 33.274,96.139 h1.52
  text "+" at 39.37,96.139 h1.52
  text "+" at 45.466,96.139 h1.52
  text "+" at 51.562,96.139 h1.52
  text "+" at 57.531,96.139 h1.52
  text "+" at 63.627,96.139 h1.52
  text "+" at 69.723,96.139 h1.52
  text "LED" at 78.629,95.742 h1 r90
  text "+" at 80.915,95.234 h1 r90
  text "+" at 85.868,94.345 h1 r90
  text "2N2222" at 95.012,93.456 h1 r90
  text "33K" at 85.106,92.948 h1 r180
  text "9V" at 2.286,91.948 h2
  text "-" at 13.335,90.17 h1.52
  text "+" at 1.143,89.408 h1.52
  text "-" at 92.599,89.392 h1 r90
  text "+" at 87.265,88.757 h1 r90
  text "-" at 84.598,88.503 h1 r90
  text "2.2u" at 13.843,88.265 h1
  text "100K" at 21.971,88.011 h1.5
  text "NE555" at 35.433,88.011 h1.5
  text "10" at 72.263,88.011 h1 r90
  text "10K" at 10.033,87.757 h1 r90
  text "CD4017" at 52.324,87.63 h2
  text "100U" at 85.995,87.614 h0.8 r90
  text "100U" at 91.71,87.487 h0.8 r90
  text "+" at 92.599,87.487 h1 r90
  text "-" at 1.143,86.741 h1.52
  text "33K" at 85.487,86.09 h1 r180
  text "A.I. PCB" at 78.883,85.709 h1 r90
  text "+" at 13.589,85.344 h1.52
  text "A.I. PCB" at 2.54,82.55 h2
  text "DUAL PATTERN KNIGHT RIDER 12 LED" at 30.861,82.423 h1.4
  text "+" at 81.423,82.026 h1 r90
  text "-" at 81.55,80.248 h1 r90
  text "LED" at 79.01,79.613 h1 r90
  text "2N2222" at 95.012,78.216 h1 r90
  text "-" at 3.048,78.105 h1.52
  text "-" at 9.017,78.105 h1.52
  text "-" at 14.986,78.105 h1.52
  text "-" at 21.082,78.105 h1.52
  text "-" at 27.178,78.105 h1.52
  text "-" at 33.274,78.105 h1.52
  text "-" at 39.37,78.105 h1.52
  text "-" at 45.466,78.105 h1.52
  text "-" at 51.562,78.105 h1.52
  text "-" at 57.531,78.105 h1.52
  text "-" at 63.627,78.105 h1.52
  text "-" at 69.723,78.105 h1.52
  text "+" at 2.921,75.946 h1.52
  text "+" at 9.017,75.946 h1.52
  text "+" at 14.986,75.946 h1.52
  text "+" at 21.082,75.946 h1.52
  text "+" at 27.178,75.946 h1.52
  text "+" at 33.274,75.946 h1.52
  text "+" at 39.37,75.946 h1.52
  text "+" at 45.466,75.946 h1.52
  text "+" at 51.562,75.946 h1.52
  text "+" at 57.531,75.946 h1.52
  text "+" at 63.627,75.946 h1.52
  text "+" at 69.723,75.946 h1.52
  text "10" at 89.154,72.009 h1 r180
  text "9V" at 2.286,71.755 h2
  text "-" at 13.335,69.977 h1.52
  text "-" at 79.248,69.469 h1.52 r90
  text "+" at 81.407,69.469 h1.52 r90
  text "+" at 1.143,69.215 h1.52
  text "2.2u" at 13.843,68.072 h1
  text "10" at 72.263,67.945 h1 r90
  text "100K" at 21.971,67.818 h1.5
  text "NE555" at 35.433,67.818 h1.5
  text "10K" at 10.033,67.564 h1 r90
  text "CD4017" at 52.324,67.437 h2
  text "-" at 1.143,66.548 h1.52
  text "+" at 13.589,65.151 h1.52
  text "-" at 79.248,63.373 h1.52 r90
  text "+" at 81.407,63.373 h1.52 r90
  text "A.I. PCB" at 2.54,62.357 h2
  text "DUAL PATTERN KNIGHT RIDER 12 LED" at 30.861,62.23 h1.4
  text "-" at 3.048,57.404 h1.52
  text "-" at 9.017,57.404 h1.52
  text "-" at 14.986,57.404 h1.52
  text "-" at 21.082,57.404 h1.52
  text "-" at 27.178,57.404 h1.52
  text "-" at 33.274,57.404 h1.52
  text "-" at 39.37,57.404 h1.52
  text "-" at 45.466,57.404 h1.52
  text "-" at 51.562,57.404 h1.52
  text "-" at 57.531,57.404 h1.52
  text "-" at 63.627,57.404 h1.52
  text "-" at 69.723,57.404 h1.52
  text "-" at 79.248,57.277 h1.52 r90
  text "+" at 81.407,57.277 h1.52 r90
  text "+" at 2.921,55.245 h1.52
  text "+" at 9.017,55.245 h1.52
  text "+" at 14.986,55.245 h1.52
  text "+" at 21.082,55.245 h1.52
  text "+" at 27.178,55.245 h1.52
  text "+" at 33.274,55.245 h1.52
  text "+" at 39.37,55.245 h1.52
  text "+" at 45.466,55.245 h1.52
  text "+" at 51.562,55.245 h1.52
  text "+" at 57.531,55.245 h1.52
  text "+" at 63.627,55.245 h1.52
  text "+" at 69.723,55.245 h1.52
  text "CD4017" at 89.916,52.07 h2 r90
  text "-" at 79.248,51.308 h1.52 r90
  text "+" at 81.407,51.308 h1.52 r90
  text "9V" at 2.286,51.054 h2
  text "-" at 13.335,49.276 h1.52
  text "+" at 1.143,48.514 h1.52
  text "2.2u" at 13.843,47.371 h1
  text "10" at 72.263,47.371 h1 r90
  text "100K" at 21.971,47.117 h1.5
  text "NE555" at 35.433,47.117 h1.5
  text "10K" at 10.033,46.863 h1 r90
  text "CD4017" at 52.324,46.736 h2
  text "-" at 1.143,45.847 h1.52
  text "-" at 79.248,45.212 h1.52 r90
  text "+" at 81.407,45.212 h1.52 r90
  text "+" at 13.589,44.45 h1.52
  text "A.I. PCB" at 2.54,41.656 h2
  text "DUAL PATTERN KNIGHT RIDER 12 LED" at 30.861,41.529 h1.4
  text "-" at 79.248,39.116 h1.52 r90
  text "+" at 81.407,39.116 h1.52 r90
  text "-" at 3.048,37.084 h1.52
  text "-" at 9.017,37.084 h1.52
  text "-" at 14.986,37.084 h1.52
  text "-" at 21.082,37.084 h1.52
  text "-" at 27.178,37.084 h1.52
  text "-" at 33.274,37.084 h1.52
  text "-" at 39.37,37.084 h1.52
  text "-" at 45.466,37.084 h1.52
  text "-" at 51.562,37.084 h1.52
  text "-" at 57.531,37.084 h1.52
  text "-" at 63.627,37.084 h1.52
  text "-" at 69.723,37.084 h1.52
  text "NE555" at 89.535,35.179 h1.5 r90
  text "+" at 2.921,34.925 h1.52
  text "+" at 9.017,34.925 h1.52
  text "+" at 14.986,34.925 h1.52
  text "+" at 21.082,34.925 h1.52
  text "+" at 27.178,34.925 h1.52
  text "+" at 33.274,34.925 h1.52
  text "+" at 39.37,34.925 h1.52
  text "+" at 45.466,34.925 h1.52
  text "+" at 51.562,34.925 h1.52
  text "+" at 57.531,34.925 h1.52
  text "+" at 63.627,34.925 h1.52
  text "+" at 69.723,34.925 h1.52
  text "-" at 79.248,33.02 h1.52 r90
  text "+" at 81.407,33.02 h1.52 r90
  text "9V" at 2.286,30.734 h2
  text "DUAL PATTERN KNIGHT RIDER 12 LED" at 95.123,30.607 h1.4 r90
  text "-" at 13.335,28.956 h1.52
  text "+" at 1.143,28.194 h1.52
  text "2.2u" at 13.843,27.051 h1
  text "10" at 72.263,26.924 h1 r90
  text "-" at 79.248,26.924 h1.52 r90
  text "+" at 81.407,26.924 h1.52 r90
  text "100K" at 21.971,26.797 h1.5
  text "NE555" at 35.433,26.797 h1.5
  text "10K" at 10.033,26.543 h1 r90
  text "CD4017" at 52.324,26.416 h2
  text "-" at 1.143,25.527 h1.52
  text "+" at 13.589,24.13 h1.52
  text "100K" at 89.535,21.717 h1.5 r90
  text "A.I. PCB" at 2.54,21.336 h2
  text "DUAL PATTERN KNIGHT RIDER 12 LED" at 30.861,21.209 h1.4
  text "-" at 79.248,20.828 h1.52 r90
  text "+" at 81.407,20.828 h1.52 r90
  text "-" at 3.048,16.764 h1.52
  text "-" at 9.017,16.764 h1.52
  text "-" at 14.986,16.764 h1.52
  text "-" at 21.082,16.764 h1.52
  text "-" at 27.178,16.764 h1.52
  text "-" at 33.274,16.764 h1.52
  text "-" at 39.37,16.764 h1.52
  text "-" at 45.466,16.764 h1.52
  text "-" at 51.562,16.764 h1.52
  text "-" at 57.531,16.764 h1.52
  text "-" at 63.627,16.764 h1.52
  text "-" at 69.723,16.764 h1.52
  text "-" at 79.248,14.732 h1.52 r90
  text "+" at 81.407,14.732 h1.52 r90
  text "+" at 2.921,14.605 h1.52
  text "+" at 9.017,14.605 h1.52
  text "+" at 14.986,14.605 h1.52
  text "+" at 21.082,14.605 h1.52
  text "+" at 27.178,14.605 h1.52
  text "+" at 33.274,14.605 h1.52
  text "+" at 39.37,14.605 h1.52
  text "+" at 45.466,14.605 h1.52
  text "+" at 51.562,14.605 h1.52
  text "+" at 57.531,14.605 h1.52
  text "+" at 63.627,14.605 h1.52
  text "+" at 69.723,14.605 h1.52
  text "2.2u" at 89.281,13.589 h1 r90
  text "+" at 92.202,13.335 h1.52 r90
  text "-" at 87.376,13.081 h1.52 r90
  text "9V" at 2.286,10.414 h2
  text "10K" at 89.789,9.779 h1 r180
  text "-" at 79.248,8.763 h1.52 r90
  text "+" at 81.407,8.763 h1.52 r90
  text "-" at 13.335,8.636 h1.52
  text "+" at 1.143,7.874 h1.52
  text "2.2u" at 13.843,6.731 h1
  text "10" at 72.263,6.604 h1 r90
  text "100K" at 21.971,6.477 h1.5
  text "NE555" at 35.433,6.477 h1.5
  text "10K" at 10.033,6.223 h1 r90
  text "CD4017" at 52.324,6.096 h2
  text "-" at 1.143,5.207 h1.52
  text "+" at 13.589,3.81 h1.52
  text "-" at 79.248,2.794 h1.52 r90
  text "+" at 81.407,2.667 h1.52 r90
  text "A.I. PCB" at 94.996,2.286 h2 r90
  text "9V" at 85.598,2.032 h2 r90
  text "A.I. PCB" at 2.54,1.016 h2
  text "DUAL PATTERN KNIGHT RIDER 12 LED" at 30.861,0.889 h1.4
  text "+" at 88.138,0.889 h1.52 r90
  text "-" at 90.805,0.889 h1.52 r90
Bottom Overlay:
  text "A.I. PCB" at 78.883,92.948 h1 r90
  text "A.I. PCB" at 16.891,82.55 h2
  text "DUAL PATTERN KNIGHT RIDER 12 LED" at 74.422,82.423 h1.4
  text "DUAL PATTERN KNIGHT RIDER 12 LED" at 95.123,74.168 h1.4 r90
  text "A.I. PCB" at 16.891,62.357 h2
  text "DUAL PATTERN KNIGHT RIDER 12 LED" at 74.422,62.23 h1.4
  text "A.I. PCB" at 16.891,41.656 h2
  text "DUAL PATTERN KNIGHT RIDER 12 LED" at 74.422,41.529 h1.4
  text "A.I. PCB" at 16.891,21.336 h2
  text "DUAL PATTERN KNIGHT RIDER 12 LED" at 74.422,21.209 h1.4
  text "A.I. PCB" at 94.996,16.637 h2 r90
  text "A.I. PCB" at 16.891,1.016 h2
  text "DUAL PATTERN KNIGHT RIDER 12 LED" at 74.422,0.889 h1.4